# Altium PCB ad_test2_PCB_4.PcbDoc
Units mil, origin at the board's own origin, x right, y up, seen from the top; angles counter-clockwise.
Board outline 2150 x 870 mil, 4 copper layers (Top Layer, VCC, GND, Bottom Layer), stack 35.6 mil thick; 23 components, 22 nets, 98 pads, 24 vias.
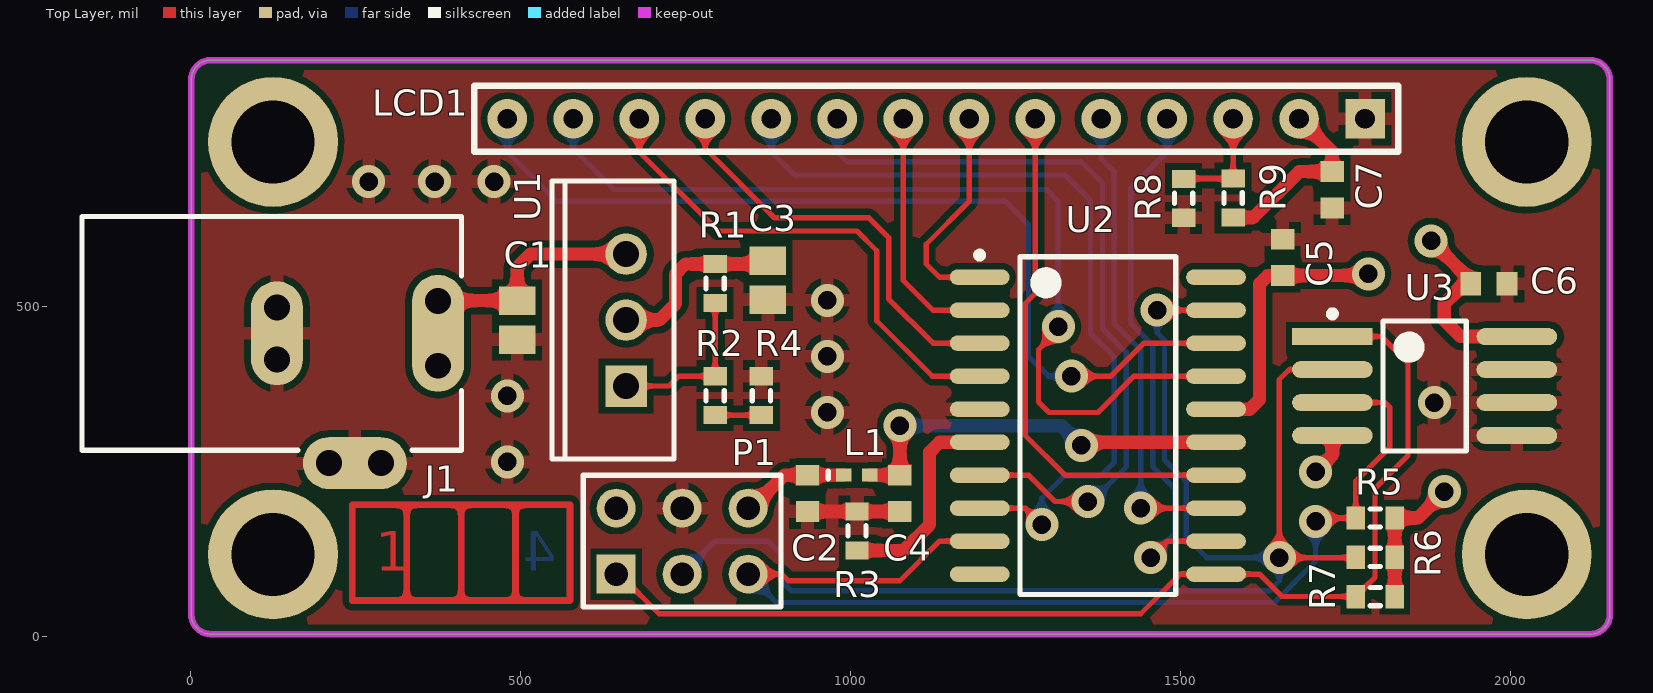
[diagram p0: Top Layer view]
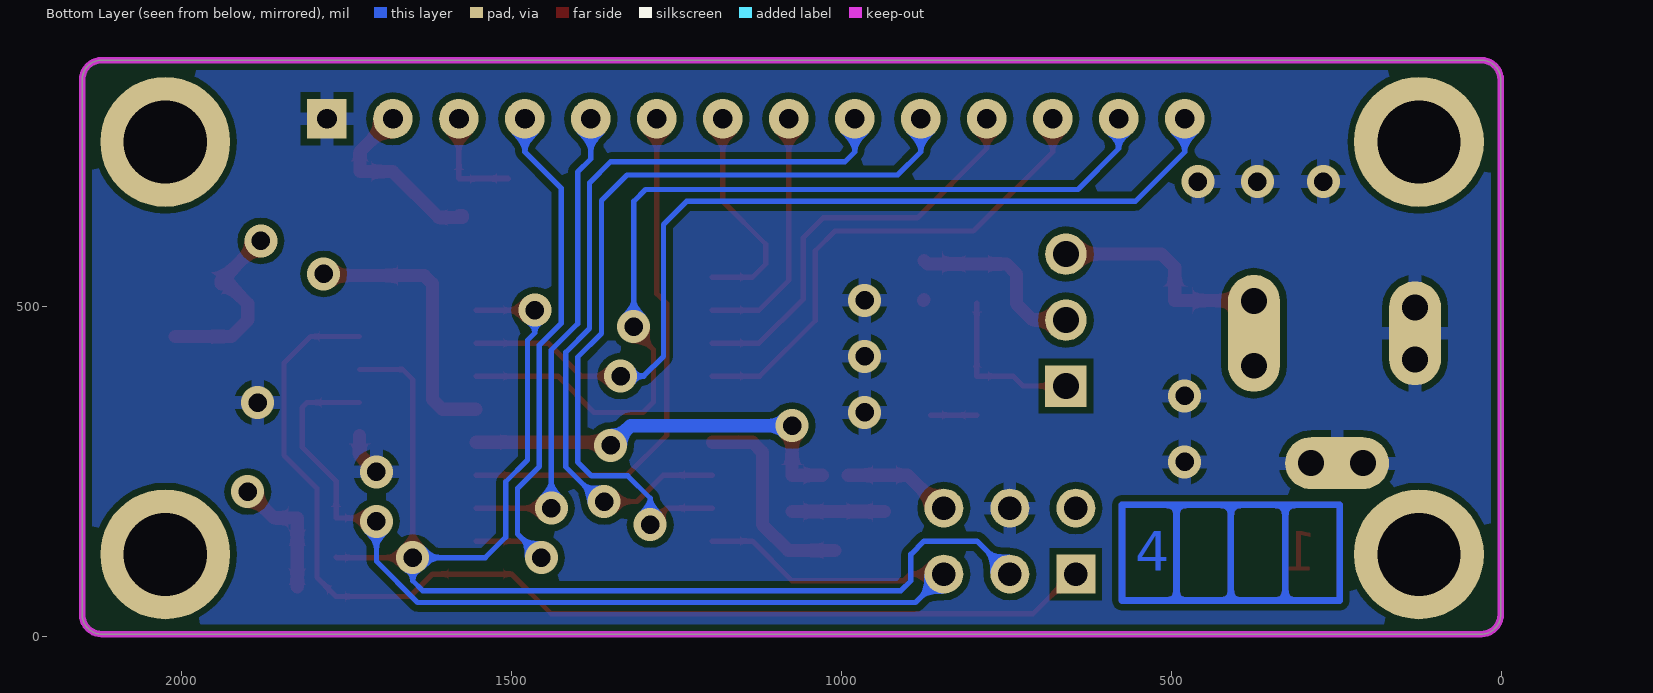
[diagram p1: Bottom Layer view, seen from below]
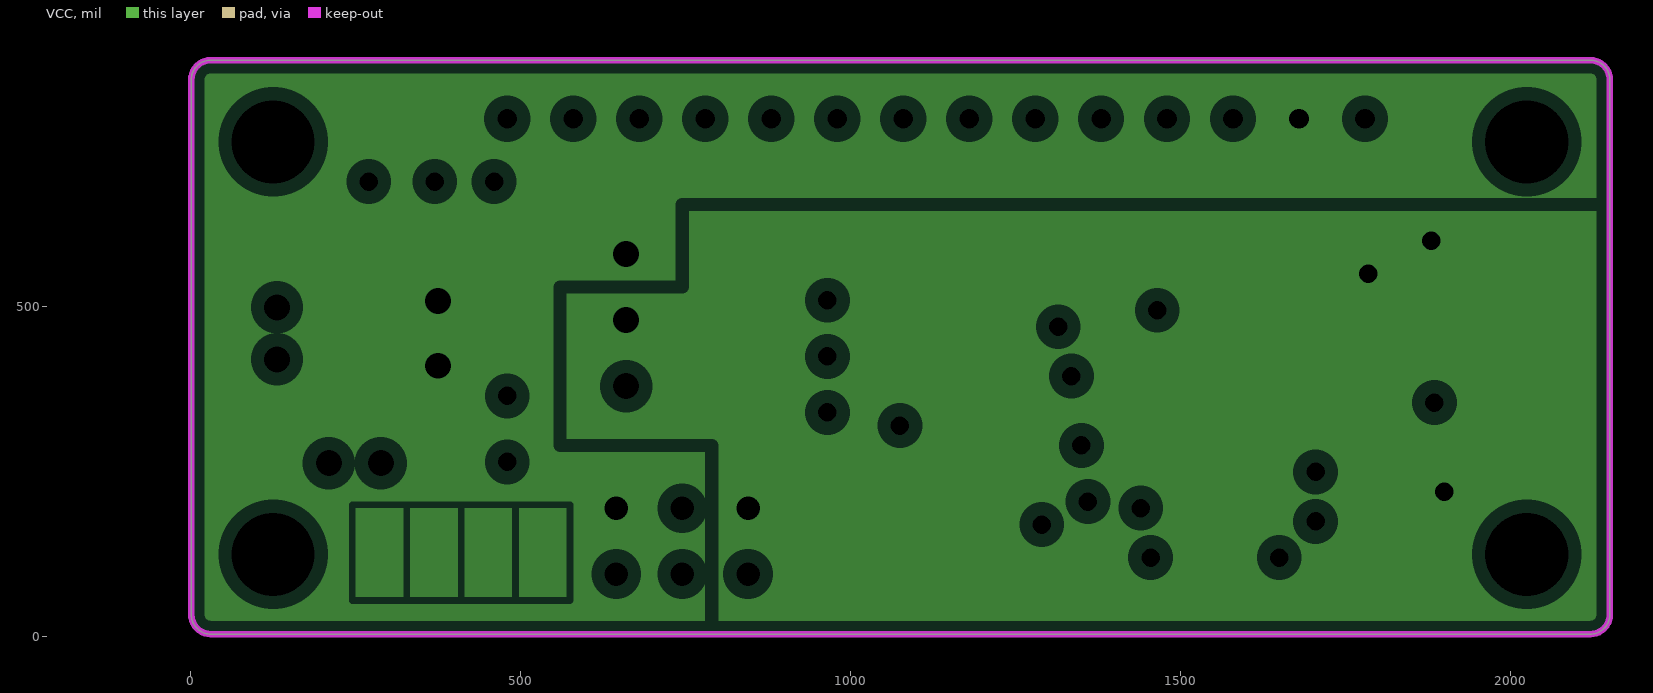
[diagram p2: VCC, clearances drawn from the general rule]
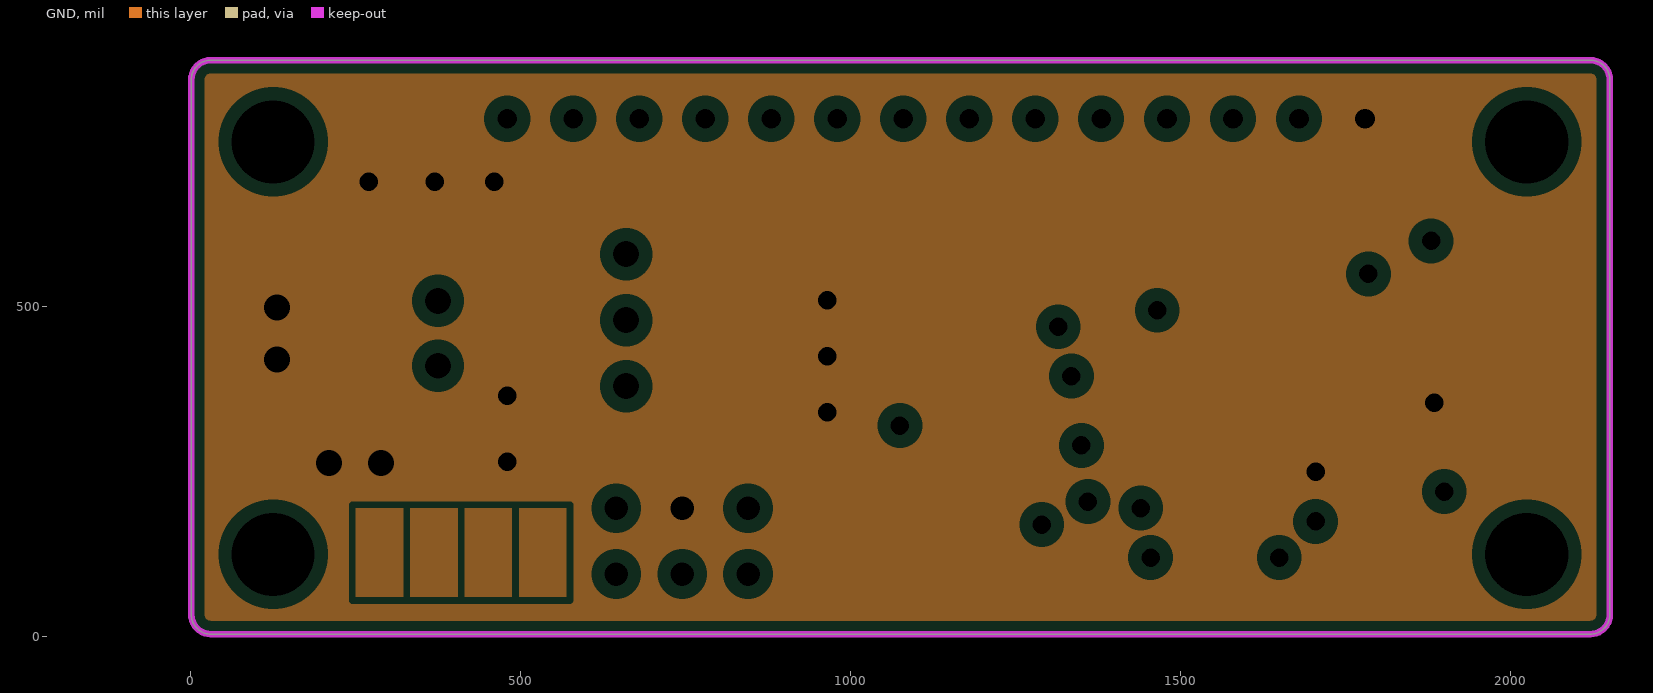
[diagram p3: GND, clearances drawn from the general rule]

## Layer stack, top to bottom
Top Solder: solder mask 0.4, Solder Resist, Dk 3.5
Top Layer: signal copper 1.4
Dielectric 1: core 10, FR-4, Dk 4.2
VCC: plane copper 1.4, net (Multiple Nets)
Dielectric 2: prepreg 10, Dk 4.2
GND: plane copper 1.4, net GND
Dielectric 3: core 10, Dk 4.2
Bottom Layer: signal copper 1.4
Bottom Solder: solder mask 0.4, Solder Resist, Dk 3.5

## Board outline
1,34 1,844 cw(c31,844) 31,874 2121,874 cw(c2121,844) 2151,844 2151,34 cw(c2121,34) 2121,4 31,4 cw(c31,34)

## Design rules (kind name [scope] priority, off if disabled: settings)
Clearance [All] p1: gap=10 ignorepadtopadclearanceinfootprint=FALSE except(0: Arc-Hole Track-Hole SMDPad-Hole THPad-Hole Via-Hole Fill-Hole Poly-Hole Region-Hole Text-Hole)
PlaneClearance [All] p1: clearance=20
PlaneConnect [All] p1: planeconnectstyle=Relief reliefexpansion=20 reliefentries=4 reliefconductorwidth=20 reliefairgap=10
PolygonConnect [All] p1: connectstyle=Relief reliefconductorwidth=20 reliefentries=4 polygonreliefangle="90 Angle" airgapwidth=10
RoutingVias [All] p1: holewidth=28 width=50 viastyle="Through Hole" minholewidth=28 minwidth=50 maxholewidth=28 maxwidth=50
SolderMaskExpansion [All] p1: expansion=4
Width [All] p1: maxlimit=20 minlimit=5 preferedwidth=10
28 further rules are at their usual default settings.

## Classes and differential pairs
net class RB[0..7]: RB0 RB1 RB2 RB3 RB4 RB5 RB6 RB7
component class Sensor: C6 U3
component class Power: C1 C2 C3 C4 J1 L1 R1 R2 R3 R4 U1
component class MCU: C5 R5 R6 R7
component class LCD: C7 LCD1 R8 R9
component class ad_test2_top: P1

## Components (designator, comment, footprint, x,y, rotation, side; value= is the part's Value field where it differs from the comment)
C1 "Cap Pol3" C0805 495,480 r270 top value=100pF (schematic designator C4)
C2 "Cap Semi" 1608[0603] 935,217.44 r90 top value=100pF (schematic designator C5)
C3 "Cap Pol3" C0805 875,540.47 r270 top value=100pF
C4 "Cap Semi" 1608[0603] 1075,217.44 r90 top value=100pF (schematic designator C6)
C5 "Cap Semi" 1608[0603] 1655,575 r270 top value=100pF (schematic designator C2)
C6 "Cap Semi" 1608[0603] 1967.56,535 r180 top value=100pF (schematic designator C7)
C7 "Cap Semi" 1608[0603] 1730,677.44 r90 top value=100pF (schematic designator C1)
J1 "PWR2.5" KLD-0202 -164.37,460 r0 top
L1 "Inductor" 0402-A 1009.68,245 r0 top value=10mH
LCD1 "DMC-50448N" DMC-50448N 1780,785 r180 top
P1 "Header 3X2" HDR2X3 645,95 r0 top
R1 "Res3" J1-0603 795,535.47 r270 top value=4.7K (schematic designator R6)
R2 "Res3" J1-0603 795,365.47 r270 top value=4.7K (schematic designator R7)
R3 "Res3" J1-0603 1010,160.47 r270 top value=1K (schematic designator R8)
R4 "Res3" J1-0603 865,365.47 r90 top value=4.7K (schematic designator R9)
R5 "Res3" J1-0603 1795.47,180 r180 top value=1K (schematic designator R3)
R6 "Res3" J1-0603 1795.47,120.5 r180 top value=1K (schematic designator R4)
R7 "Res3" J1-0603 1795.47,61 r180 top value=1K (schematic designator R5)
R8 "Res3" J1-0603 1505,664.53 r270 top value=1K (schematic designator R2)
R9 "Res3" J1-0603 1580,665 r90 top value=1K (schematic designator R1)
U1 "LM317KC" KC03 660,480 r90 top (schematic designator U2)
U2 "PIC16C770-I/SO" SOIC-SO20_N 1375,320 r0 top (schematic designator U1)
U3 "TCN75" TCN75-SOIC 1730.47,455 r0 top

## Footprints (in the part's own frame and the unit in brackets; to place one, negate y for a bottom-side part, rotate by r counter-clockwise, add the part's x,y. Pads: shape width x height; smd on the part's side, far side on the other; paste and mask are expansions set on the pad)
0402-A [mm] "Chip Inductor, Body 1.0x0.5mm, IPC High Density"
  rect 0.6x0.5 smd: 1(-0.5,0) 2(0.5,0)
  silkscreen extent -1.1,-0.15 -1.1,0.15, body extent -0.55,-0.3 0.55,0.3, height 0.55
1608[0603] [mm] "Chip Capacitor, Body 1.6x0.8mm, IPC High Density"
  rect 0.8x0.9 smd: 1(-0.7,0) 2(0.7,0)
  body extent -0.87,-0.48 0.87,0.48, height 1.3
C0805 [mm] "Chip Capacitor, Body 2.0x1.3mm, IPC High Density"
  rect 1.1x1.4 smd: 1(-0.75,0) 2(0.75,0)
  body extent -1.1,-0.72 1.1,0.72, height 1.4
DMC-50448N [mil] "LCD,DMC-50448N"
  rect 60x60 hole 30: 1(0,0)
  round 60 hole 30: 2(100,0) 3(200,0) 4(300,0) 5(400,0) 6(500,0) 7(600,0) 8(700,0) 9(800,0) 10(900,0) 11(1000,0) 12(1100,0) 13(1200,0) 14(1300,0)
  silkscreen extent -50,-50 1350,50, body extent -10,50 -10,50, height 10
HDR2X3 [mm] "Connector; Header; 3x2 Position"
  rect 1.5x1.5 hole 0.9: 1(0,0)
  round 1.5 hole 0.9: 2(0,2.54) 3(2.54,0) 4(2.54,2.54) 5(5.08,0) 6(5.08,2.54)
  silkscreen extent -1.27,-1.27 6.35,3.81
J1-0603 [mm] "Chip Resistor, Body 1.6x0.8mm, IPC High Density"
  rect 0.7x0.9 smd: 1(-0.75,0) 2(0.75,0)
  silkscreen extent -0.2,-0.35 0.2,0.35, body extent -0.85,-0.48 0.85,0.48, height 0.9
KC03 [mm] "TO, Thru-Hole, Vertical, Heatsink Mounted; 3 In-Line Leads; Pitch 2.54 mm"
  rect 1.6x1.6 hole 1: 1(-2.54,0)
  round 1.6 hole 1: 2(0,0) 3(2.54,0)
  silkscreen extent -5.35,-1.85 5.35,2.85
KLD-0202 [mm] "DC Power Jack, 2.5mm, KLD Series, PCB Mount"
  oval 2x4.5 all layers, no hole: 1(13.7,0)
  round 1.5 hole 1: 1A(13.7,-1.25) 1B(13.7,1.25) 2A(7.5,-1) 2B(7.5,1) 3A(9.5,-5) 3B(11.5,-5)
  oval 2x4 all layers, no hole: 2(7.5,0)
  oval 4x2 all layers, no hole: 3(10.5,-5)
  silkscreen extent 0,-4.5 14.6,4.5
SOIC-SO20_N [mm] "SOIC, 20-Leads, Body 12.8x7.5mm, Pitch 1.27mm, IPC Medium Density"
  oval 2.3x0.6 smd: 1(-4.55,5.715) 2(-4.55,4.445) 3(-4.55,3.175) 4(-4.55,1.905) 5(-4.55,0.635) 6(-4.55,-0.635) 7(-4.55,-1.905) 8(-4.55,-3.175) 9(-4.55,-4.445) 10(-4.55,-5.715) 11(4.55,-5.715) 12(4.55,-4.445) 13(4.55,-3.175) 14(4.55,-1.905) 15(4.55,-0.635) 16(4.55,0.635) 17(4.55,1.905) 18(4.55,3.175) 19(4.55,4.445) 20(4.55,5.715)
  silkscreen extent -4.67,-6.5 3,6.69, body extent -3.75,-6.5 3.75,6.5, height 2.65
TCN75-SOIC [mm] "TCN75-SOIC, 8-Leads, Body 4.90x3.90mm, Pitch 1.27mm, IPC Low Density"
  rect 3.1x0.65 smd: 1(0,0)
  oval 3.1x0.65 smd: 2(0,-1.27) 3(0,-2.54) 4(0,-3.81) 5(7.1,-3.81) 6(7.1,-2.54) 7(7.1,-1.27) 8(7.1,0)
  silkscreen extent -0.12,-4.41 5.15,1, body extent 1.55,-4.41 5.55,0.6, height 1.75

## Part data
C1 C3: "Polarized Capacitor (Surface Mount)", LatestRevisionDate=29-May-2009, LatestRevisionNote="IPC-7351 Footprint Added.", PackageDescription="Chip Capacitor", PackageReference=C0805, Published=8-Jun-2000, Publisher="Altium Limited"
C2 C4 C5 C6 C7: "Capacitor (Semiconductor SIM Model)", LatestRevisionDate=29-May-2009, LatestRevisionNote="IPC-7351 Footprint Added.", PackageDescription="Chip Capacitor", PackageReference=C1206, Published=8-Jun-2000, Publisher="Altium Limited"
J1: "Low Voltage Power Supply Connector", ComponentLink1Description="Manufacturer Link", ComponentLink1URL=http://domino.kycon.com/internet/Products.html, DatasheetDocument=09-May-2002, Published=17-Dec-2003, Publisher="Altium Limited"
LCD1: "8 Character X 2 Line / LCD Display"
P1: "Header, 3-Pin, Dual row", LatestRevisionDate=17-Jul-2002, LatestRevisionNote="Re-released for DXP Platform.", Publisher="Altium Limited"
R1 R2 R3 R4 R5 R6 R7 R8 R9: "Resistor", LatestRevisionDate=29-May-2009, LatestRevisionNote="IPC-7351 Footprint Added.", PackageDescription="Chip Resistor", PackageReference=J1-0603, Published=8-Jun-2000, Publisher="Altium Limited"
U1: "3-Terminal Adjustable Regulator", ComponentLink1Description="Manufacturer Link", ComponentLink1URL=http://www.ti.com/, DatasheetVersion=Feb-1988, Note="Pin 2 is electrically connected to tab", PackageDescription="TO, Thru-Hole, Vertical, Heatsink Mounted; 3 In-Line Leads; Pitch 2.54 mm", PackageReference=KC03, PackageVersion=Sep-1995, Published=15-Apr-2002, Publisher="Altium Limited"
U2: "8-Bit CMOS Microcontroller with 12-Bit A/D, 2K (x14-Bit words) EPROM, 256 Bytes RAM, 20-Pin SOIC, 4.0 to 5.5V Supply Range, Industrial Temperature", Supplier Part Number 1=PIC16C770-I/SO-ND, Code_IPC=SOIC127P1030-20, Code_JEDEC=MS-013-AC, ComponentAvailability="Unknown. Contact manufacturer to determine status.", ComponentLink1Description=Datasheet, ComponentLink1URL=http://ww1.microchip.com/downloads/en/DeviceDoc/41120b.pdf, ComponentLink2Description="Packaging Specification", ComponentLink2URL=http://www.microchip.com/stellent/groups/techpub_sg/documents/packagingspec/en012702.pdf, ComponentLink3Description="Microchip.com Home", ComponentLink3URL=http://www.microchip.com/, DatasheetVersion="revB, Feb-2002", LatestRevisionDate=29-Jan-2009, LatestRevisionNote="Sch. layout revised. 3D Model Removed.", PackageDescription="20-Lead Plastic Small Outline (SO) - Wide 7.50mm Body [SOIC]", PackageReference=SOIC-SO20, PackageVersion="revBB, Aug-2009", Published=11-Oct-2004, Publisher="Altium Limited", Supplier 1=Digi-Key
U3: "TCN75数字温度传感器将-40°C到+125°C范围内的温度转换为数字"
L1: Code_IEC=1005, Code_JEITA=0402, LatestRevisionDate=29-May-2009, LatestRevisionNote="IPC-7351 Footprint Added.", PackageDescription="Chip Inductor", PackageReference=0402-A, Published=8-Jun-2000, Publisher="Altium Limited"

## Free pads (board coordinates)
  round 196.85 hole 125.98: 0(125,125) 0(125,750) 0(2025,125) 0(2025,750)

## Via types
v1: diameter 50, hole 28, Top Layer to Bottom Layer, 24 vias

## Nets (pads, with @x,y where several pads share a name; then routed paths per layer and width w, separated by ;. In a path a pad name is that pad's centre, name@x,y a point inside that pad or via, vN(x,y) a via of type N, cw(c..) or ccw(c..) an arc to the next point about the centre after c; other vN are vias at no path point)
3V3: C2.2 C3.1 C5.2 C6.2 L1.1 P1.6 R1.1 R5.1 R6.1 R7.1 U1.2 U2.16 U3.8 | length 1340.8
  Top Layer w20: U1.2 710,480 735,505 735,550 750,565 R1.1 870,565 C3.1 ; P1.6 850,195 900,245 C2.2 L1.1 ; U2.16 1605,345 1620,360 1620,535 1632.44,547.44 C5.2 1782.44,547.44 v1(1785,550) ; R7.1@1825,76 R6.1 R5.1@1825,175 ; R5.1 1860,180 v1(1900,220) ; v1(1880,600) 1940,540 C6.2 1930,535 1900,505 1900,480 1925,455 U3.8
5V: C1.1 C7.2 J1.1 J1.1A J1.1B LCD1.2 P1.2 R9.1 U1.3 | length 631.2
  Top Layer w10: J1.1B J1.1B@375.31,509.53
  Top Layer w20: J1.1B@375.31,509.53 C1.1 495,560 515,580 U1.3 ; R9.1@1575,635.47 1575,638.31 R9.1@1580,638.31 ; R9.1 1610.47,635.47 1680,705 C7.2 1730,720 1730,735 LCD1.2
AGND: R3.2 U2.6 | length 318.3
  Top Layer w20: R3.2 1080.94,130.94 1120,170 1120,280 1135,295 U2.6
AVDD: C4.2 L1.2 U2.15 | length 614.3
  Top Layer w20: L1.2 C4.2 v1(1075,320) ; v1(1350,290) 1355,295 U2.15
  Bottom Layer w20: v1(1075,320) 1320,320 v1(1350,290)
GND: C1.2 C2.1 C3.2 C4.1 C5.1 C6.1 C7.1 J1.2 J1.2A J1.2B J1.3 J1.3A J1.3B LCD1.1 P1.4 R3.1 R4.2 R8.2 U2.5 U3.4 U3.5 U3.6 U3.7 | length 249.1
  Top Layer w20: J1.3 J1.3B ; C3.2 C3.2@875.94,510 ; C2.1 935.12,190 R3.1 1010.12,189.88 C4.1 ; v1(1705,250) 1730.47,275.47 U3.4 ; LCD1.1 LCD1.1@1782.72,785
  other v1: 480,265 965,340 1885,355 480,365 965,425 965,510 270,690 370,690 460,690
NetLCD1_3: LCD1.3 R8.1 R9.2 | length 221.1
  Top Layer w8: 1560,695 1505.94,695 R8.1 1579.53,694.06 R9.2 LCD1.3
NetLCD1_4: LCD1.4 U2.12 | length 839.5
  Top Layer w8: v1(1455,120) 1480,145 U2.12
  Bottom Layer w8: v1(1455,120) 1491,156 1491,225 1458,258 1458,442 1425,475 1425,680 1480,735 LCD1.4
NetLCD1_5: LCD1.5 U2.13 | length 729
  Top Layer w8: v1(1440,195) U2.13
  Bottom Layer w8: LCD1.5 1380,724.46 1400,704.46 1400,474.54 1440,434.54 v1(1440,195)
NetLCD1_6: LCD1.6 U2.14 | length 800.2
  Top Layer w8: LCD1.6 1280,520 1265,505 1265,305 1325,245 U2.14
NetP1_1: P1.1 R7.2 U2.11 U3.1 | length 1702.6
  Top Layer w8: P1.1 650,95 710,35 1440,35 1500,95 U2.11 1619.85,95 1653.85,61 R7.2 1795,90.06 1795,225 1845,275 1845,415 1805,455 U3.1
NetP1_3: P1.3 R6.2 U2.19 U3.2 | length 2094.5
  Top Layer w8: v1(1465,495) U2.19 ; U3.2 1665,405 1650,390 v1(1650,120) 1765.44,120 R6.2
  Bottom Layer w8: P1.3 795,145 875,145 895,125 895,85 910,70 1635,70 1650,85 v1(1650,120) ; v1(1465,495) 1465,460.46 1476,449.46 1476,268 1509,235 1509,151 1540,120 v1@1645,120
NetP1_5: P1.5 R5.2 U2.9 U3.3 | length 1686
  Top Layer w8: P1.5 896,95 906,85 1075,85 1135,145 U2.9 ; v1(1705,175) 1710,180 R5.2 1765.94,235.94 1817.5,287.5 1817.5,347.5 1810,355 U3.3
  Bottom Layer w8: P1.5 888,52 1642.46,52 1705,114.54 v1(1705,175)
NetR1_2: R1.2 R2.1 U1.1 | length 252.2
  Top Layer w8: U1.1 725,380 740,395 R2.1 R1.2
NetR2_2: R2.2 R4.1 | length 70
  Top Layer w8: R2.2 R4.1
RB0: LCD1.7 U2.1 | length 336.1
  Top Layer w8: LCD1.7 1180,660 1115,595 1115,565 1135,545 U2.1
RB1: LCD1.8 U2.2 | length 379.5
  Top Layer w8: LCD1.8 1080,540 1125,495 U2.2
RB2: LCD1.9 U2.7 | length 1177.3
  Top Layer w8: U2.7 1270.15,245 1310.15,205 v1(1360,205)
  Bottom Layer w8: LCD1.9 980,735 995,720 1350,720 1382,688 1382,467.09 1418,431.09 1418,257.54 1365.46,205 v1(1360,205)
RB3: LCD1.10 U2.8 | length 1252.8
  Top Layer w8: U2.8 1265,195 v1(1290,170)
  Bottom Layer w8: LCD1.10 880,735 915,700 1325,700 1364,661 1364,459.63 1400,423.63 1400,265 1379,244 1324,244 1290,210 v1(1290,170)
RB4: LCD1.11 U2.3 | length 637.5
  Top Layer w8: LCD1.11 780,740 885,635 1028,635 1058,605 1058,512 1125,445 U2.3
RB5: LCD1.12 U2.4 | length 768.8
  Top Layer w8: LCD1.12 680,735 800,615 1010,615 1040,585 1040,478.94 1123.94,395 U2.4
RB6: LCD1.13 U2.17 | length 1428.1
  Top Layer w8: v1(1315,470) 1315,465 1285,435 1285,356 1301,340 1375,340 1430,395 U2.17
  Bottom Layer w8: LCD1.13 580,740 642,678 1297,678 1315,660 v1(1315,470)
RB7: LCD1.14 U2.18 | length 1402.8
  Top Layer w8: v1(1335,395) 1395,395 1445,445 U2.18
  Bottom Layer w8: LCD1.14 480,735 555,660 1235,660 1270,625 1270,425 1300,395 v1(1335,395)
pads on no net: U2.10 U2.20
copper on no net: | length 2770
  Top Layer w10: 327.5,55 327.5,200 ; 410,55 410,200 ; 492.5,55 492.5,200 ; 245,55 245,200 575,200 575,55 245,55
  Bottom Layer w10: 327.5,55 327.5,200 ; 410,55 410,200 ; 492.5,55 492.5,200 ; 245,55 575,55 575,200 245,200 245,55

## Polygon pours and split planes (outlines as drawn)
GND on Top Layer "GND_L01_P006" (solid, remove dead copper, pour order 6): 1,34 1,844 cw(c31,844) 31,874 2121,874 cw(c2121,844) 2151,844 2151,34 cw(c2121,34) 2121,4 31,4 cw(c31,34)
GND on Bottom Layer "GND_L04_P007" (solid, remove dead copper, pour order 7): 1,34 1,844 cw(c31,844) 31,874 2121,874 cw(c2121,844) 2151,844 2151,34 cw(c2121,34) 2121,4 31,4 cw(c31,34)
GND on GND (split plane): 2123.58,853.65 2125.99,852.65 2128.06,851.06 2129.65,848.99 2130.65,846.58 2130.94,844.36 2130.9,844 2130.9,34 2130.94,33.64 2130.65,31.42 2129.65,29.01 2128.06,26.94 2125.99,25.35 2123.58,24.35 2121.36,24.06 2121,24.1 31,24.1 30.64,24.06 28.42,24.35 26.01,25.35 23.94,26.94 22.35,29.01 21.35,31.42 21.06,33.64 21.1,34 21.1,844 21.06,844.36 21.35,846.58 22.35,848.99 23.94,851.06 26.01,852.65 28.42,853.65 30.64,853.94 31,853.9 2121,853.9 2121.36,853.94
GND on GND (split plane): 322.4,60.1 250.1,60.1 250.1,194.9 322.4,194.9
GND on GND (split plane): 569.9,60.1 497.6,60.1 497.6,194.9 569.9,194.9
GND on GND (split plane): 404.9,60.1 332.6,60.1 332.6,194.9 404.9,194.9
GND on GND (split plane): 487.4,60.1 415.1,60.1 415.1,194.9 487.4,194.9
no net on VCC (split plane): 569.9,60.1 497.6,60.1 497.6,194.9 569.9,194.9
no net on VCC (split plane): 487.4,60.1 415.1,60.1 415.1,194.9 487.4,194.9
3V3 on VCC (split plane): 2130.9,34 2130.94,33.64 2130.65,31.42 2129.65,29.01 2128.06,26.94 2125.99,25.35 2123.58,24.35 2121.36,24.06 2121,24.1 800.09,24.1 800.09,290 799.74,292.61 798.74,295.04 797.13,297.13 795.04,298.73 792.61,299.74 790,300.09 570.09,300.09 570.09,519.91 745,519.91 747.61,520.26 750.04,521.27 752.13,522.87 753.73,524.96 754.74,527.39 755.09,530 755.09,644.91 2130.9,644.91
no net on VCC (split plane): 404.9,60.1 332.6,60.1 332.6,194.9 404.9,194.9
no net on VCC (split plane): 322.4,60.1 250.1,60.1 250.1,194.9 322.4,194.9
5V on VCC (split plane): 2123.58,853.65 2125.99,852.65 2128.06,851.06 2129.65,848.99 2130.65,846.58 2130.94,844.36 2130.9,844 2130.9,665.09 745,665.09 742.39,664.74 739.96,663.73 737.87,662.13 736.27,660.04 735.26,657.61 734.91,655 734.91,540.09 560,540.09 557.39,539.74 554.96,538.73 552.87,537.13 551.27,535.04 550.26,532.61 549.91,530 549.91,290 550.26,287.39 551.27,284.96 552.87,282.87 554.96,281.27 557.39,280.26 560,279.91 779.91,279.91 779.91,24.1 31,24.1 30.64,24.06 28.42,24.35 26.01,25.35 23.94,26.94 22.35,29.01 21.35,31.42 21.06,33.64 21.1,34 21.1,844 21.06,844.36 21.35,846.58 22.35,848.99 23.94,851.06 26.01,852.65 28.42,853.65 30.64,853.94 31,853.9 2121,853.9 2121.36,853.94

## Keep-outs
Keep-Out Layer:
  the board outline again, w10

## Other copper
Top Layer:
  text "1" at 280,100 h60
Bottom Layer:
  text "4" at 555,100 h60
VCC (plane layer: these items are gaps in the copper):
  region: 280,135
  lines w10: 327.5,55 327.5,200 ; 410,55 410,200 ; 492.5,55 492.5,200 ; 245,55 245,200 575,200 575,55 245,55
  lines w20: 800,4 790,14 790,290 560,290 560,530 745,530 745,655 2151,655
  text "2" at 350,100 h60
GND (plane layer: these items are gaps in the copper):
  lines w10: 327.5,55 327.5,200 ; 410,55 410,200 ; 492.5,55 492.5,200 ; 245,55 245,200 575,200 575,55 245,55
  text "3" at 470,100 h60